# Altium PCB H03R0x.PcbDoc
Units mil, origin at the board's own origin, x right, y up, seen from the top; angles counter-clockwise.
Board outline 1363.78 x 1181.1 mil, 2 copper layers (Top Layer, Bottom Layer); 42 components, 17 nets, 98 pads, 50 vias.
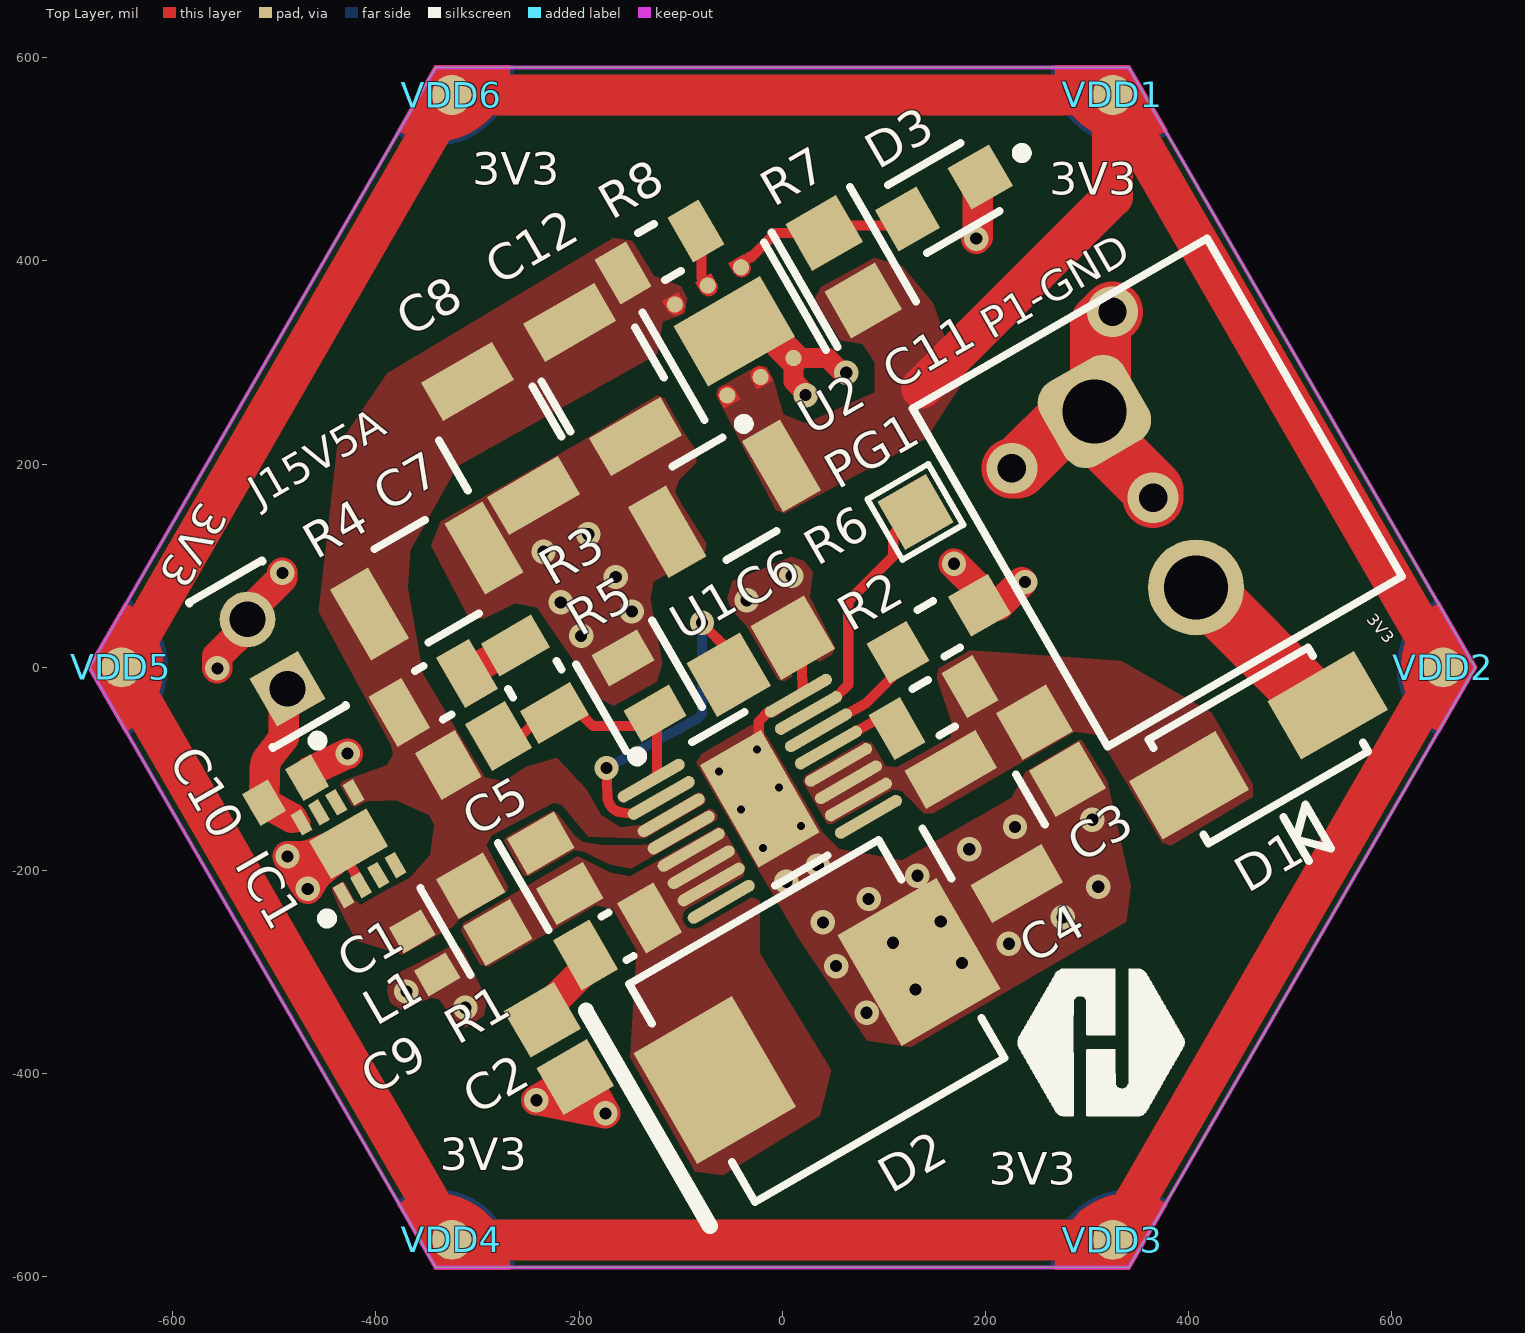
[diagram p0: Top Layer view]
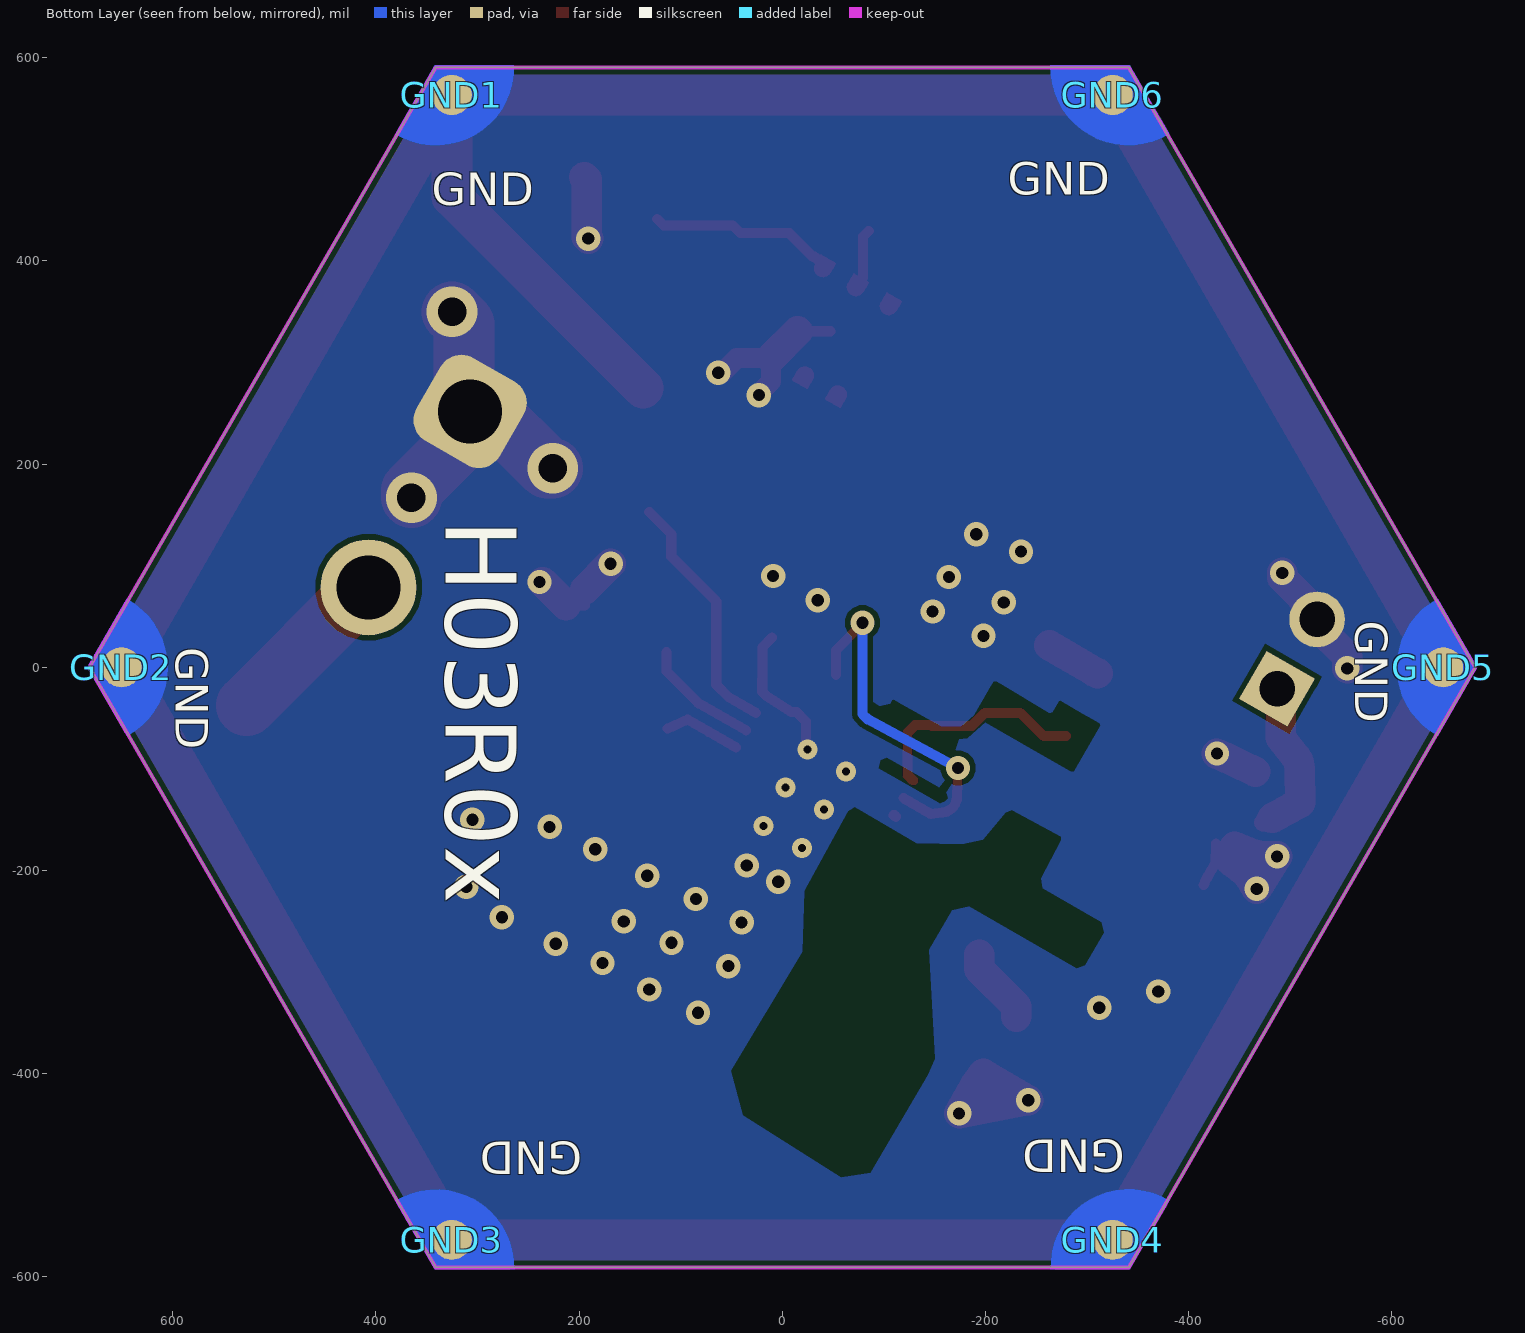
[diagram p1: Bottom Layer view, seen from below]

## Layer stack, top to bottom
Top Solder: solder mask 0.4, Solder Resist, Dk 3.5
Top Layer: signal copper 1.4
Dielectric 1: dielectric 12.6, FR-4, Dk 4.8
Bottom Layer: signal copper 1.4
Bottom Solder: solder mask 0.4, Solder Resist, Dk 3.5

## Board outline
-340.94,-590.55 340.94,-590.55 681.89,0 340.94,590.55 -340.94,590.55 -681.89,0

## Design rules (kind name [scope] priority, off if disabled: settings)
Clearance Clearance_U2_ExposePad [InComponent('U2') vs InComponent('U2')] p1: gap=5 ignorepadtopadclearanceinfootprint=TRUE
Clearance [All] p2: gap=5 ignorepadtopadclearanceinfootprint=TRUE
MinimumSolderMaskSliver [All] p1: minsoldermaskwidth=4
PolygonConnect [All] p1: connectstyle=Direct reliefconductorwidth=10 reliefentries=4 polygonreliefangle="90 Angle" airgapwidth=10
RoutingVias [All] p1: holewidth=12 width=24 viastyle="Through Hole" minholewidth=8 minwidth=18 maxholewidth=14 maxwidth=28
SilkToSilkClearance [All] p1: silktosilkclearance=6
SilkToSolderMaskClearance [IsPad] p1: minsilkscreentomaskgap=4 clearancetoexposedcopper=TRUE
SolderMaskExpansion [All] p1: expansion=0 istentingtop=FALSE
SupplyNets "Schematic Supply Nets_4" [InNet('VIN')] p1: voltage=0.000
SupplyNets "Schematic Supply Nets_3" [InNet('GND')] p2: voltage=0.000
SupplyNets "Schematic Supply Nets" [InNet('VDD')] p3: voltage=0.000
Width [All] p1: maxlimit=100 minlimit=8 preferedwidth=10 bottomlayer_minwidth=10 bottomlayer_maxwidth=10 minimp=50.000000 maximp=50.000000 favimp=50.000000
27 further rules are at their usual default settings.

## Components (designator, comment, footprint, x,y, rotation, side; value= is the part's Value field where it differs from the comment)
C1 "VJ0805Y474KXQRW1BC" CAPC2013X145X50LL20T20 -223.47,-197.81 r120 top
C2 "08055C471KAT4A" CAPC2013X94X50NL20T25 -220,-375 r300 top
C3 "08055C104KAZ2A" CAPC2013X94X50NL20T25 264.35,-82.1 r300 top
C4 "GRM32ER71H106KA12L" FP-GRM32-MFG 198.26,-156.62 r300 top value=10uF
C5 "08051A100JAT4A" CAPC2013X94X50LL20T25 -304.07,-81.83 r210 top
C6 "0805YC103MAT2A" CAPC2013X94X50ML20T25 -21.25,11 r30 top
C7 "GRM32ED71A476KE15L" FP-GRM32E-0_3-0_2-MFG -350,85 r30 top
C8 "GRM32ED71A476KE15L" FP-GRM32E-0_3-0_2-MFG -277.38,225.26 r300 top
C9 "06032U1R0BAT2A" CAPC1508X91X25LL25T13 -352,-281 r300 top
C10 "06032U1R0BAT2A" CAPC1508X91X25LL25T13 -488.86,-120.8 r30 top
C11 "GRM32ER71H106KA12L" FP-GRM32-MFG -57,166 r210 top value=10uF
C12 "GRM32ER71H106KA12L" FP-GRM32-MFG -176.8,283.33 r300 top value=10uF
D1 "B260A-13-F" DIOD-SMA-2_V 468.5,-76.77 r210 top
D2 "B560C-13-F" DIOD-B5X0C-2_M 34,-348 r30 top
D3 "APHCM2012CGCK-F01" FP-APHCM2012CGCK-F01-MFG 159,462 r210 top
GND1 "HEXABIT_UART_PORT" HEXABIT_POWER_PORT_D 325.2,563.39 r0 top
GND2 "HEXABIT_UART_PORT" HEXABIT_POWER_PORT_D 650.39,0 r300 top
GND3 "HEXABIT_UART_PORT" HEXABIT_POWER_PORT_D 325.2,-563.39 r240 top
GND4 "HEXABIT_UART_PORT" HEXABIT_POWER_PORT_D -325.2,-563.39 r180 top
GND5 "HEXABIT_UART_PORT" HEXABIT_POWER_PORT_D -650.39,0 r120 top
GND6 "HEXABIT_UART_PORT" HEXABIT_POWER_PORT_D -325.2,563.39 r60 top
IC1 "LS0505EVD22" SON50P200X200X80-9N -426.9,-173.56 r120 top
J15V5A "TMM-102-03-F-S" FP-TMM-102-03-F-S-MFG -506.68,13.1 r120 top (schematic designator J1)
L1 "MLZ2012A3R3WT000" FP-MLZ2012-0_85-IPC_C -293.3,-237.96 r120 top
P1-GND "691701500002B" 691701500002B 369.09,172.24 r300 top (schematic designator P1)
PG1 "Pad1" TESTPOINT_1P4MM_SQ 131,153 r30 top (schematic designator P2)
R1 "CRCW08052R00FNEA" RESC2013X50X30NL20T20 -162.13,-264.68 r30 top
R2 "RMCF0805ZT0R00" FP-RMCF0805-MFG 148.91,-39.64 r210 top
R3 "CRCW0805330KFKEA" FP-CRCW0805-e3-MFG -243.47,-11.6 r120 top
R4 "CRCW0805330KFKEA" FP-CRCW0805-e3-MFG -343.64,-25.11 r210 top
R5 "RC2012F3163CS" FP-RC2012-IPC_C -141,-18 r120 top
R6 "CR0805-FX-5492ELF" FP-CR0805-MFG 154,38 r30 top
R7 "RMCF0805JT1K50" FP-RMCF0805-IPC_A 60.4,394.14 r120 top
R8 "RMCF0805ZT0R00" FP-RMCF0805-MFG -120.84,408.84 r30 top
U1 "LT3976IMSE#TRPBF" LT-MSE-16-EDP_M -22.09,-129.28 r30 top
U2 "LD39200PU33R" FP-DFN6-7946637-MFG -47.36,330.79 r120 top
VDD1 "HEXABIT_UART_PORT" HEXABIT_POWER_PORT_U 325.2,563.39 r60 top
VDD2 "HEXABIT_UART_PORT" HEXABIT_POWER_PORT_U 650.39,0 r0 top
VDD3 "HEXABIT_UART_PORT" HEXABIT_POWER_PORT_U 325.2,-563.39 r300 top
VDD4 "HEXABIT_UART_PORT" HEXABIT_POWER_PORT_U -325.2,-563.39 r240 top
VDD5 "HEXABIT_UART_PORT" HEXABIT_POWER_PORT_U -650.39,0 r180 top
VDD6 "HEXABIT_UART_PORT" HEXABIT_POWER_PORT_U -325.2,563.39 r120 top

## Footprints (in the part's own frame and the unit in brackets; to place one, negate y for a bottom-side part, rotate by r counter-clockwise, add the part's x,y. Pads: shape width x height; smd on the part's side, far side on the other; paste and mask are expansions set on the pad)
691701500002B [mm] "THR - 5,08mm - PCB Vertical Open - 02p"
  rrect50% 2.4x2.4 hole 1.6: 1(-2.54,-0.35)
  round 2.4 hole 1.6: 2(2.54,-0.35)
  silkscreen extent -4.88,-4.25 4.88,4.25, body extent -4.88,-4.25 4.88,4.25, height 12.05
CAPC1508X91X25LL25T13 [mm] "Chip Capacitor, 2-Leads, Body 1.52x0.76mm, IPC High Density"
  rect 0.74x0.92 smd: 1(-0.62,0) 2(0.62,0)
  body extent -0.88,-0.51 0.89,0.51, height 0.91
CAPC2013X94X50LL20T25 [mm] "Chip Capacitor, 2-Leads, Body 2.01x1.25mm, IPC High Density"
  rect 1.15x1.35 smd: 1(-0.725,0) 2(0.725,0)
  body extent -1.1,-0.72 1.1,0.73, height 0.94
CAPC2013X94X50ML20T25 [mm] "Chip Capacitor, 2-Leads, Body 2.01x1.25mm, IPC Low Density"
  rect 1.55x1.55 smd: 1(-0.925,0) 2(0.925,0)
  body extent -1.11,-0.73 1.11,0.73, height 0.94
CAPC2013X94X50NL20T25 [mm] "Chip Capacitor, 2-Leads, Body 2.01x1.25mm, IPC Medium Density"
  rect 1.35x1.45 smd: 1(-0.825,0) 2(0.825,0)
  body extent -1.11,-0.73 1.11,0.73, height 0.94
CAPC2013X145X50LL20T20 [mm] "Chip Capacitor, 2-Leads, Body 2.00x1.25mm, IPC High Density"
  rect 1.05x1.35 smd: 1(-0.725,0) 2(0.725,0)
  body extent -1.1,-0.73 1.1,0.73, height 1.45
DIOD-B5X0C-2_M [mm] "Molded Diode, 2-Leads, Body 7.11x6.22mm, IPC Low Density"
  rect 2.85x3.2 smd: 1(-2.95,0) 2(2.95,0)
  silkscreen extent -4.87,-3.15 3.6,3.15, body extent -3.56,-3.11 3.55,3.11, height 2.63
DIOD-SMA-2_V [mm]
  rect 2.5x1.7 smd: 1(-2,0) 2(2,0)
  silkscreen extent -2.3,-1.5 2.3,3.14, body extent -2.52,-1.46 2.52,1.46, height 2.4
FP-APHCM2012CGCK-F01-MFG [mm]
  rect 1.2x1.2 smd paste+0 mask+0: 1(-1.05,0) 2(1.05,0)
  silkscreen extent -2.37,-0.98 1.05,0.97, body extent -1.75,-0.78 1.75,0.77, height 0.25
FP-CR0805-MFG [mm]
  rect 1.15x1.15 smd paste+0 mask+0: 1(-1.175,0) 2(1.175,0)
  silkscreen extent -0.23,-0.68 0.23,0.68, body extent -1.85,-0.78 1.85,0.78, height 0.25
FP-CRCW0805-e3-MFG [mm]
  rect 0.95x1.45 smd paste+0 mask+0: 1(-0.975,0) 2(0.975,0)
  silkscreen extent -0.13,-0.7 0.13,0.7, body extent -1.55,-0.82 1.55,0.82, height 0.25
FP-DFN6-7946637-MFG [mm]
  round 0.405 smd paste+0 mask+0: 1(-1.3,0.95) 2(-1.321,0) 3(-1.321,-0.95) 4(1.3,-0.95) 5(1.321,0) 6(1.321,0.95)
  rect 1.75x2.5 smd paste+0 mask+0: 7(0,0)
  Top Layer region: 1.55,0.725 1.275,0.725 1.189,0.742 1.116,0.791 1.067,0.864 1.05,0.95 1.05,0.95 1.067,1.036 1.116,1.109 1.189,1.158 1.275,1.175 1.275,1.175 1.55,1.175
  Top Layer region: -1.55,-0.725 -1.275,-0.725 -1.189,-0.742 -1.116,-0.791 -1.067,-0.864 -1.05,-0.95 -1.05,-0.95 -1.067,-1.036 -1.116,-1.109 -1.189,-1.158 -1.275,-1.175 -1.275,-1.175 -1.55,-1.175
  Top Layer region: -1.55,1.175 -1.275,1.175 -1.189,1.158 -1.116,1.109 -1.067,1.036 -1.05,0.95 -1.05,0.95 -1.067,0.864 -1.116,0.791 -1.189,0.742 -1.275,0.725 -1.275,0.725 -1.55,0.725
  Top Layer region: -1.55,0.225 -1.275,0.225 -1.189,0.208 -1.116,0.159 -1.067,0.086 -1.05,0 -1.05,0 -1.067,-0.086 -1.116,-0.159 -1.189,-0.208 -1.275,-0.225 -1.275,-0.225 -1.55,-0.225
  Top Layer region: 1.55,-1.175 1.275,-1.175 1.189,-1.158 1.116,-1.109 1.067,-1.036 1.05,-0.95 1.05,-0.95 1.067,-0.864 1.116,-0.791 1.189,-0.742 1.275,-0.725 1.275,-0.725 1.55,-0.725
  Top Layer region: 1.55,-0.225 1.275,-0.225 1.189,-0.208 1.116,-0.159 1.067,-0.086 1.05,0 1.05,0 1.067,0.086 1.116,0.159 1.189,0.208 1.275,0.225 1.275,0.225 1.55,0.225
  silkscreen extent -2.25,-1.75 1.55,1.75, body extent -1.65,-1.65 1.65,1.65, height 0.25
FP-GRM32-MFG [mm]
  rect 1.1x2.05 smd paste+0 mask+0: 1(-1.65,0) 2(1.65,0)
  silkscreen extent -0.73,-1.35 0.72,1.35, body extent -2.3,-1.45 2.3,1.45, height 0.25
FP-GRM32E-0_3-0_2-MFG [mm]
  rect 1.1x2.05 smd paste+0 mask+0: 1(-1.65,0) 2(1.65,0)
  silkscreen extent -0.72,-1.35 0.72,1.35, body extent -2.3,-1.45 2.3,1.45, height 0.25
FP-MLZ2012-0_85-IPC_C [mil]
  rect 45.45x53.39 smd paste+0 mask+0: 1(-26.61,0) 2(26.61,0)
  silkscreen extent -49,-44 49,44, body extent -53,-32 53,32, height 10
FP-RC2012-IPC_C [mil]
  rect 35.63x51.5 smd paste+0 mask+0: 1(-31.52,0) 2(31.52,0)
  silkscreen extent -49,-43 49,43, body extent -53,-31 53,31, height 10
FP-RMCF0805-IPC_A [mil]
  rect 53.33x57.56 smd paste+0 mask+0: 1(-38.42,0) 2(38.42,0)
  silkscreen extent -65,-45 65,45, body extent -85,-48 85,48, height 10
FP-RMCF0805-MFG [mm]
  rect 0.9x1.3 smd paste+0 mask+0: 1(-1.05,0) 2(1.05,0)
  silkscreen extent -0.23,-0.68 0.23,0.68, body extent -1.6,-0.78 1.6,0.77, height 0.25
FP-TMM-102-03-F-S-MFG [mm]
  rect 1.39x1.39 hole 0.89 paste-2539.97 mask+0: 1(-1,0)
  round 1.39 hole 0.89 paste-2539.97 mask+0: 2(1,0)
  silkscreen extent -2.62,-1.05 2.1,1.05, body extent -2.1,-2.07 2.1,2.07, height 0.25
HEXABIT_POWER_PORT_D [mm]
  rrect100% 1x1 smd far side paste+0: Pwr_D(0,0)
  Bottom Layer region: 1.418,-0.978 0.633,-1.25 -0.194,-1.171 -0.914,-0.754 -1.394,-0.076 -1.549,0.74 -1.549,0.74 0.429,0.74
HEXABIT_POWER_PORT_U [mm]
  rrect100% 1x1 smd paste+0: Pwr_U(0,0)
  Top Layer region: -0.081,-1.631 -0.68,-1.115 -1.01,-0.395 -1.01,0.395 -0.68,1.115 -0.081,1.631 -0.081,1.631 0.858,0
LT-MSE-16-EDP_M [mm] "SOP, 16-Leads, Body 4.1x3.1mm, Pitch 0.5mm, Thermal Pad 2.95x1.76mm, IPC Low Density"
  oval 1.89x0.3 smd: 1(-2.125,1.75) 2(-2.125,1.25) 3(-2.125,0.75) 4(-2.125,0.25) 5(-2.125,-0.25) 6(-2.125,-0.75) 7(-2.125,-1.25) 8(-2.125,-1.75) 9(2.125,-1.75) 10(2.125,-1.25) 11(2.125,-0.75) 12(2.125,-0.25) 13(2.125,0.25) 14(2.125,0.75) 15(2.125,1.25) 16(2.125,1.75)
  rect 1.76x2.95 smd: 17(0,0)
  silkscreen extent -2.25,-2.08 0.76,2.57, body extent -1.55,-2.05 1.55,2.05, height 1.1
RESC2013X50X30NL20T20 [mm] "Chip Resistor, 2-Leads, Body 2.00x1.25mm, IPC Medium Density"
  rect 1.05x1.45 smd: 1(-0.925,0) 2(0.925,0)
  silkscreen extent -0.1,-0.63 0.1,0.63, body extent -1.1,-0.72 1.1,0.73, height 0.5
SON50P200X200X80-9N [mm]
  rect 0.6x0.3 smd: 1(-1.05,0.75) 2(-1.05,0.25) 3(-1.05,-0.25) 4(-1.05,-0.75) 5(1.05,-0.75) 6(1.05,-0.25) 7(1.05,0.25) 8(1.05,0.75)
  rect 1.1x1.65 smd: 9(0,0)
  silkscreen extent -1.47,1.28 -1.23,1.52, body extent -1.05,-1 1.05,1, height 0.8
TESTPOINT_1P4MM_SQ [mil] "TESTPOINT_1P4MM_SQ"
  rect 55x55 smd: 1(0,0)
  silkscreen extent -35,-35 35,35

## Part data
C1: library part CMP-2007-01617-1, Capacitance=.47μF, Manufacturer=Vitramon, Part Number=VJ0805Y474KXQRW1BC
C2: library part CMP-2007-04419-1, Capacitance=470pF, Manufacturer="AVX Interconnect / Elco", Part Number=08055C471KAT4A
C3: library part CMP-2007-04372-1, Capacitance=100nF, Manufacturer="AVX Interconnect / Elco", Part Number=08055C104KAZ2A
C4 C11 C12: library part CMP-2000-05261-2, "CAP CER 10UF 50V X7R 1210", Capacitance=10uF, Manufacturer=Murata, Package=GRM32, Temperature="-55°C to +125°C", Temperature Characteristic=X7R, Temperature Coefficient=15%, Temperature Range High=+125°C, Temperature Range Low=-55°C, Tolerance=10%, Voltage Rating=50V, Automotive=No, Category=Cap, ComponentLink2Description=Datasheet, ComponentLink2URL=https://search.murata.co.jp/Ceramy/image/img/A01X/G101/ENG/GRM32ER71H106KA12-01.pdf, Device Class L1="Passive Components", Device Class L2=Capacitors, Device Class L3="Ceramic Capacitors", Digikey Description="CAP CER 10UF 50V X7R 1210", Height=2.7mm, Lead Free=Yes, Manufacturer Part Number=GRM32ER71H106KA12L, Material=Ceramic, Mouser Description="1210 10 uF 50 V ±10% Tolerance X7R SMT Multilayer Ceramic Capacitor", Octopart=https://octopart.com/grm32er71h106ka12l-murata-10470987, RoHS=TRUE
C5: library part CMP-2007-04117-1, Capacitance=10pF, Manufacturer="AVX Interconnect / Elco", Part Number=08051A100JAT4A
C6: library part CMP-2007-04453-1, Capacitance=10nF, Manufacturer="AVX Interconnect / Elco", Part Number=0805YC103MAT2A
C7 C8: library part CMP-06035-032018-1, "Chip Multilayer Ceramic Capacitors for General Purpose, 1210, 47uF, X7T, +22%/-33%, 10%, 10V", Capacitance=47uF, Case Code (Imperial)=1210, Case Code (Metric)=3225, Dielectric=X7T, Max Operating Temperature=125°C, Min Operating Temperature=-55°C, Package Quantity=1000, Tolerance=10%, Voltage Rating=10V, Case/Package=1210, Height=2.5mm, Length=0.126inch, Mount="Surface Mount", Packaging="Tape and Reel", Termination=SMD/SMT, Thickness=0.106inch, Voltage Rating (DC)=10V, Weight=0.00388oz, Width=0.098inch
C9 C10: library part CMP-2006-04662-1, Capacitance=1pF, Manufacturer="AVX Interconnect / Elco", Part Number=06032U1R0BAT2A
D1: library part CMP-2000-04933-1, "Schottky Barrier Rectifier, 60 V, 2 A, -65 to 150 degC, 2-Pin SMA, RoHS, Tape and Reel", If - Forward Current=2A, Ifsm - Forward Surge Current=50A, Ir - Reverse Current=500uA, Manufacturer=DiodesIncorporated, Maximum Operating Temperature=+150C, Minimum Operating Temperature=-65C, Operating Temperature Range=-65Cto+150C, Package / Case=SMA, Package Description="2-Pin Surface Mounted Assembly, Body 4.3 x 2.605 mm, Height 2.4 mm", Package Reference=SMA-2, Vf - Forward Voltage=0.7V, Vrrm - Repetitive Reverse Voltage=60V, Brand=DiodesIncorporated, Configuration=Single, Datasheet URL=http://www.diodes.com/_files/datasheets/ds13004.pdf, Datasheet Version="Rev. 22-2, 07/2015", Factory Pack Quantity=5000, Height=2.1mm, Length=4.6mm, Manufacturer URL=http://www.diodes.com/, Mounting Style=SMD/SMT, Packaging=Reel, Product=SchottkyDiodes, Product Category=SchottkyDiodes&Rectifiers, RoHS=True, Series=B260, Technology=Si, Termination Style=SMD/SMT, Type=SchottkyBarrierRectifier, Unit Weight=0.002258oz, Width=2.92mm
D2: library part CMP-2000-05098-2, "Schottky Barrier Rectifier, 5 A, 60 V, -55 to 125 degC, 2-Pin SMD, RoHS, Tape and Reel", If - Forward Current=5A, Ifsm - Forward Surge Current=100A, Ir - Reverse Current=500uA, Manufacturer=DiodesIncorporated, Maximum Operating Temperature=+125C, Minimum Operating Temperature=-55C, Operating Temperature Range=-55Cto+125C, Package / Case=SMC, Vf - Forward Voltage=0.7V, Vrrm - Repetitive Reverse Voltage=60V, Brand=DiodesIncorporated, Configuration=Single, Datasheet URL=https://datasheet.ciiva.com/27052/1538961-27052355.pdf, Datasheet Version="Rev. 7-2, 06/2007", Factory Pack Quantity=3000, Height=2.5mm, Length=7.11mm, Manufacturer URL=http://www.diodes.com/, Mounting Style=SMD/SMT, Packaging=Reel, Product=SchottkyDiodes, Product Category=SchottkyDiodes&Rectifiers, RoHS=True, Series=B560, Technology=Si, Termination Style=SMD/SMT, Type=SchottkyBarrierRectifier, Unit Weight=0.007408oz, Width=6.22mm
D3: library part CMP-44529-000062-1, "LED GREEN CLEAR CHIP SMD", Case Code (Imperial)=0805, Case Code (Metric)=2012, Color=Green, Forward Current=20mA, Forward Voltage=2.1V, Lens Color=Clear, Max Operating Temperature=85°C, Min Operating Temperature=-40°C, Package Quantity=1, Case/Package=0805, Dominant Wavelength=570nm, Height=0.4mm, Illumination Color=Green, Lead Free="Lead Free", Length=2mm, Lens Style=Clear, Luminous Intensity=40mcd, Mount="Surface Mount", Number of LEDs=1, Number of Pins=2, Packaging="Tape and Reel", RoHS Compliant=Yes, Series=APHCM, Test Current=20mA, Viewing Angle=110°, Wavelength=570nm, Width=1.25mm
GND1 GND2 GND3 GND4 GND5 GND6: library part HEXABIT_POWER_PORT_D
IC1: "Integrated Circuit", Manufacturer_Name=LITTELFUSE, Mouser Part Number=576-LS0505EVD22, Arrow Part Number=LS0505EVD22, Arrow Price/Stock=https://www.arrow.com/en/products/ls0505evd22/littelfuse?region=nac, Datasheet Link=https://www.littelfuse.com/media?resourcetype=datasheets&itemid=1bf74099-32be-4af5-b3e1-7da02015becb&filename=littelfuse-over-voltage-protection--ls0505evd22-datasheet-(1), Height=0.8mm, Manufacturer_Part_Number=LS0505EVD22, Mouser Price/Stock=https://www.mouser.co.uk/ProductDetail/Littelfuse/LS0505EVD22?qs=4ASt3YYao0X%252Bg2o9Wvd%2Ftg%3D%3D
J15V5A: library part CMP-02766-001614-1, "CONN HEADER VERT 2POS 2MM", Contact Plating=Gold, Gender=Male, Lead Free="Lead Free", Mount="Through Hole", Number of Contacts=2, Number of Rows=1, Packaging=Bulk, Pitch=2mm, Radiation Hardening=No, RoHS Compliant=Yes, Termination=Solder
L1: library part CMP-08253-000308-1, "Shielded Multilayer Inductor 3.3uH ±20% 450mA 442mΩ SMD 0805", Case Code (Imperial)=0805, Case Code (Metric)=2012, Current Rating=450mA, DC Resistance (DCR)=442mR, Inductance=3.3uH, Max Operating Temperature=125°C, Min Operating Temperature=-55°C, Package Quantity=1, Saturation Current=200mA, Self Resonant Frequency=90MHz, Test Frequency=10MHz, Tolerance=20%, Case/Package=0805, Core Material=Ferrite, Height - Seated (Max)=0.041inch, Lead Free="Lead Free", Length=0.079inch, Mount="Surface Mount", Packaging="Cut Tape", RoHS Compliant=Yes, Shielding=Shielded, Width=0.049inch
P1-GND: library part CMP-1502-02318-2, Color=Black, Current Rating=10A, Max Operating Temperature=105°C, Min Operating Temperature=-40°C, Voltage Rating=300V, Connector Type="Terminal Block", Contact Gender=Male, Contact Material=Brass, Contact Plating=Tin, Gender=Male, Housing Material=Polymer, Lead Pitch=5.08mm, Length=9.76mm, Mount="Through Hole", NexarPartId=22866741, Number of Contacts=2, Number of Pins=2, Pitch=5.08mm, REACH SVHC=Unknown, RoHS=Compliant, Termination=PCB
PG1: library part CMP-030-000029-1, "Pad  2.5mm *  2.5mm", Component Type=Standard, Design Item ID=Pad1, Library=Hexabitz, Pin Count=1, Source=Connectors.SchLib
R1: library part CMP-2001-03791-1, Manufacturer="Vishay Dale", Resistance=2Ω, Part Number=CRCW08052R00FNEA
R2 R8: library part CMP-26527-000017-1, "RES 0 OHM JUMPER 1/8W 0805", Case Code (Imperial)=0805, Case Code (Metric)=2012, Max Operating Temperature=155°C, Max Power Dissipation=125mW, Min Operating Temperature=-55°C, Resistance=0mR, Case/Package=0805, Composition="Thick Film", Contact Plating=Tin, Depth=1.25mm, Features="Automotive AEC-Q200", Height=0.026inch, Lead Free="Lead Free", Length=2mm, Military Standard=Not, Mount="Surface Mount", Number of Terminations=2, Packaging="Tape and Reel", Power Rating=125mW, Radiation Hardening=No, Width=0.049inch
R3 R4: library part CMP-2001-03821-2, "RES Thick Film, 330kΩ, 1%, 0.125W, 100ppm/°C, 0805", Case Code (Imperial)=0805, Case Code (Metric)=2012, Max Operating Temperature=155°C, Min Operating Temperature=-55°C, Package Quantity=5000, Power Rating=125mW, Resistance=330kR, Temperature Coefficient=100ppm/°C, Tolerance=1%, Voltage Rating=150V, Case/Package=0805, Composition="Thick Film", Contact Plating=Tin, Depth=1.25mm, Height=0.45mm, Lead Free="Lead Free", Length=2mm, Military Standard=Not, Packaging="Tape and Reel", Radiation Hardening=No, Termination=SMD/SMT, Voltage Rating (DC)=150V, Weight=0.000194oz, Width=1.25mm
R5: library part CMP-13261-004620-1, "Res Thick Film 0805 316kΩ 1% 0.125W ±100ppm/°C Molded SMD T/R", Case Code (Imperial)=0805, Case Code (Metric)=2012, Max Operating Temperature=155°C, Max Power Dissipation=125mW, Min Operating Temperature=-55°C, Resistance=316kR, Temperature Coefficient=100ppm/°C, Tolerance=1%, Voltage Rating (DC)=150V, Case/Package=0805, Composition="Thick Film", Contact Plating=Tin, Depth=1.25mm, Features="Moisture Resistant", Height=0.024inch, Lead Free="Lead Free", Length=2mm, Military Standard=Not, Number of Terminations=2, Packaging="Tape and Reel", Power Rating=125mW, Radiation Hardening=No, Width=0.049inch
R6: library part CMP-07231-002869-1, "Thick Film Chip Resistors 0805 54.9kΩ 0.125W 1% 100ppm/°C", Case Code (Imperial)=0805, Case Code (Metric)=2012, Max Operating Temperature=155°C, Min Operating Temperature=-55°C, Package Quantity=5000, Power Rating=125mW, Resistance=54.9kR, Temperature Coefficient=100ppm/°C, Tolerance=1%, Voltage Rating=150V, Case/Package=0805, Composition="Thick Film", Contact Plating=Tin, Depth=1.25mm, Height=0.5mm, Length=2mm, Military Standard=Not, Mount="Surface Mount", Packaging="Tape and Reel", Radiation Hardening=No, Termination=SMD/SMT, Thickness=508um, Width=1.25mm
R7: library part CMP-26527-000060-1, "1.5kΩ ±5% 0.125W 0805 Thick Film Chip Resistor AEC-Q200 compliant", Case Code (Imperial)=0805, Case Code (Metric)=2012, Max Operating Temperature=155°C, Max Power Dissipation=125mW, Min Operating Temperature=-55°C, Resistance=1.5kR, Resistor Type="Thick Film", Temperature Coefficient=100ppm/°C, Tolerance=5%, Case/Package=0805, Construction=Rectangular, Contact Plating=Tin, Depth=1.25mm, Features="Automotive AEC-Q200", Height=0.026inch, Lead Free="Lead Free", Length=0.079inch, Military Standard=Not, Mount="Surface Mount", Number of Terminations=2, Packaging="Tape and Reel", Power Rating=125mW, Radiation Hardening=No, RoHS Compliant=Yes, Series=RMCF, Size Code=0805, Width=0.049inch
U1: library part CMP-019-00049-1, "LT3976 - 40V, 5A, 2MHz Step-Down Switching Regulator with 3.3μA Quiescent Current", Max Operating Temperature=125°C, Min Operating Temperature=-40°C, Output Current=5A, Output Voltage=38.8V, Pins=16
U2: library part CMP-12153-000011-1, "IC REG LINEAR 3.3V 2A 6DFN", Case/Package=DFN, Dropout Voltage=130mV, Max Input Voltage=6V, Max Operating Temperature=125°C, Min Input Voltage=1.25V, Min Operating Temperature=-40°C, Operating Supply Current=1mA, Output Current=2A, Output Voltage=3.3V, Package Quantity=3000, Lead Free="Lead Free", Mount="Surface Mount", Number of Outputs=1, Number of Regulators=1, Output Type=Fixed, Packaging="Tape and Reel"
VDD1 VDD2 VDD3 VDD4 VDD5 VDD6: library part HEXABIT_POWER_PORT_U

## Via types
v1: diameter 24, hole 12, Top Layer to Bottom Layer, 38 vias
v2: diameter 19.68, hole 7.87, Top Layer to Bottom Layer, 6 vias
v3: diameter 24, hole 12, Top Layer to Bottom Layer, tented top, 3 vias
v4: diameter 50, hole 28, Top Layer to Bottom Layer, 3 vias

## Nets (pads, with @x,y where several pads share a name; then routed paths per layer and width w, separated by ;. In a path a pad name is that pad's centre, name@x,y a point inside that pad or via, vN(x,y) a via of type N, cw(c..) or ccw(c..) an arc to the next point about the centre after c; other vN are vias at no path point)
GND: C2.2 C3.2 C4.2 C6.2 C7.2 C8.2 C9.2 C10.2 C11.2 C12.2 D2.2 D3.1 GND1.Pwr_D GND2.Pwr_D GND3.Pwr_D GND4.Pwr_D GND5.Pwr_D GND6.Pwr_D IC1.2 IC1.9 J15V5A.2 P1-GND.1 R5.2 R6.2 U1.16 U1.17 U2.3 U2.7 | length 1292.8
  Top Layer w10: v1@-430.54,-87.47 v1(-427.86,-84.8) ; IC1.9 -426.32,-192.46 -417.38,-207.93 IC1.2 ; U2.7 U2.7@-15.31,330.79 ; v2(-25,-80.95) -23.2,-79.15 -23.2,-53.2 -13.78,-43.78 -8.49,-43.78 U1.16 19.76,-23.94 19.76,-11.3 19.38,-10.92 19.38,20.11 C6.2 ; v1(23,268) v1@23,269.5 ; v1@59.21,290 v1(63,290) ; v1@169,101.88 v1(169,102) ; R6.2@194.06,76.82 R6.2 R6.2@212.88,61.13 ; v1@235.75,84 v1(239,84)
  Top Layer w20: v1@23,269.5 11.04,281.46 U2.3 44.78,304.43 v1@59.21,290
  Top Layer w30: v1(-556,-1) -556,10.87 -526.37,40.5 J15V5A.2 -526.37,53.88 -492,88.25 v1(-492,93) ; C10.2@-465.72,-102.59 v1(-427.86,-84.8) ; IC1.9@-445.37,-176.54 -465.08,-184.34 cw(c-472.35,-165.71) -471.96,-185.71 v1(-487,-186) -482.91,-192.55 -470.22,-212.85 v1(-467,-218) -459.87,-206.39 cw(c-442.82,-216.85) -455.25,-201.18 -442.55,-191.11 IC1.9@-438.71,-188.07 ; U2.7@-15.31,330.79 U2.3 ; v1@169,101.88 R6.2@194.06,76.82 ; v1(191,422) 192.37,423.37 192.37,480.24 D3.1 ; R6.2@212.88,61.13 v1@235.75,84 ; v1(-242,-426) v1(-174,-439) -191.02,-409.52 -197.66,-399.99 -209.21,-407.07 v1(-242,-426)
  Top Layer w60: v4(226,196) 231.32,196 287.28,251.96 P1-GND.1 ; v4(325,350) 313.17,338.17 313.17,257.96 P1-GND.1 ; v4(365,167) 365,174.23 307.16,232.07 P1-GND.1
  other v1: -312,-335 -370,-319 131,-317 177,-291 223,-272 109,-271 40,-251 156,-250 276,-246 311,-216 4,-211 133,-205 35,-195 184,-179 229,-157 305,-150 -198,31 -148,55 -218,64 -35,66 -164,89 9,90 -235,114 -191,131
  other v2: -19.19,-177.61 18.31,-155.96 -40.85,-140.11 -3.34,-118.45 -62.5,-102.6
  other v3: 83,-340 53,-294 85,-228
LD_EN: R8.2 U2.5 | length 58.5
  Top Layer w10: R8.2 -79.41,423.88 -79.41,383.49 -73.37,377.45 U2.5
LD_PG: D3.2 R7.2 U2.4 | length 183.9
  Top Layer w10: U2.4 -40.56,395.42 -31.86,404.12 ; -31.06,403.31 -6.96,427.41 R7.2 48.68,434.9 116.77,434.9 D3.2
LT_BST: C1.2 U1.4
LT_EN: R2.2 U1.13 | length 77
  Top Layer w10: U1.13 72.54,-63.28 93.24,-51.33 R2.2
LT_FB: C5.1 R3.1 R5.1 U1.1 | length 223.8
  Top Layer w10: C5.1 -257.15,-67.55 -234.44,-44.85 -199.2,-44.85 -186.42,-57.62 -147.35,-57.62 -146.45,-56.72 -130.89,-56.72 -123.23,-64.38 -123.23,-105.68 U1.1
LT_JUMP: C10.1 IC1.8 J15V5A.1 | length 161.2
  Top Layer w17.56: IC1.8@-479.18,-149.93 IC1.8
  Top Layer w25.42: -482.97,-147.95 IC1.8@-479.18,-149.93
  Top Layer w30: J15V5A.1 -490.8,-24.8 -490.8,-69.38 -505.19,-87.93 ccw(c-489.39,-100.19) -509.39,-99.82 C10.1 -482.97,-147.95
LT_PG: PG1.1 U1.15 | length 245.8
  Top Layer w10: U1.15 52.86,-29.18 65,-17.04 65,65 109.25,109.25 109.25,131.25 PG1.1
LT_RT: R6.1 U1.14 | length 117.1
  Top Layer w10: U1.14 62.7,-46.23 81.11,-36.16 ccw(c76.31,-27.38) 83.38,-34.46 113.94,-3.9 R6.1
LT_SS: C6.1 U1.2 | length 354.6
  Top Layer w10: v1(-173,-99) -172,-127.65 ccw(c-156.1,-127.09) -157.79,-142.91 -146.26,-144.14 U1.2 ; v1(-79,44) -79,43.22 -52.79,17.01 C6.1
  Bottom Layer w10: v1(-173,-99) -84,-51 -79,-46 v1(-79,44)
LT_SW: C1.1 D2.1 L1.1 R1.2 U1.5 U1.6 U1.7
LT_VIN: C3.1 C4.1 D1.2 R2.1 U1.10 U1.11 U1.12
LT_VOUT: C5.2 C7.1 C8.1 C9.1 C12.1 IC1.1 IC1.5 L1.2 R4.2 R8.1 U1.3 U2.6 | length 3.3
  Top Layer w10: U1.3@-112,-147 -110.54,-145.54 U1.3
NetC2_1: C2.1 R1.1 | length 75.9
  Top Layer w30: C2.1@-230.14,-343.73 -230.14,-333.35 -193.67,-296.87 R1.1
NetR3_2: R3.2 R4.1 | length 55.1
  Top Layer w30: R4.1 -307.19,-4.07 -274.39,14.87 R3.2
VDD: C11.1 R7.1 U2.1 U2.2 VDD1.Pwr_U VDD2.Pwr_U VDD3.Pwr_U VDD4.Pwr_U VDD5.Pwr_U VDD6.Pwr_U | length 4269.2
  Top Layer w40: 137,275 325.2,463.2
  Top Layer w40.38: 325.2,463.2 VDD1.Pwr_U ; VDD1.Pwr_U VDD6.Pwr_U VDD5.Pwr_U VDD4.Pwr_U VDD3.Pwr_U VDD2.Pwr_U VDD1.Pwr_U
VIN: D1.1 P1-GND.2 | length 177.6
  Top Layer w40: P1-GND.2 P1-GND.2@410.97,78.75 ; D1.1@527.12,-37.4 D1.1
  Top Layer w60: P1-GND.2@410.97,78.75 D1.1@527.12,-37.4
pads on no net: IC1.3 IC1.4 IC1.6 IC1.7 U1.8 U1.9

## Polygon pours and split planes (outlines as drawn)
LT_VOUT on Top Layer "LT_VOUT_L01_P011" (solid, pour order 11): -159.56,-157.16 -137.94,-154.9 -82.65,-123.08 -78.18,-124.27 -75.45,-130.58 -76.87,-134.21 -135.64,-168.44 -190.87,-166.83 -216.72,-135.59 -225,-133 -286,-165 -291.44,-175.17 -270,-216 -270.68,-221.48 -319,-249 -324.54,-255.45 -374.07,-282.75 -419.16,-268.91 -435,-239 -443,-220 -443,-216 -433,-211 -430.27,-212.36 -421.55,-228.73 -414.96,-232.02 -367.27,-207.67 -346.43,-184.75 -342.49,-155.19 -347.58,-145.78 -380.19,-130.58 -409,-132 -420,-137 -423.55,-135.59 -435,-116 -433,-112 -389.5,-96.5 -382.89,-86 -385.09,-76.42 -445.78,35.77 -456.33,55.29 -438.13,216.62 -388.89,289.57 -166,423 -147.55,419.74 -126.29,385.33 -99.61,374.89 -93.54,363.3 -96.65,347.73 -117.8,340.26 -122.82,308.34 -320,198 -366.06,115.49 -368.86,78.32 -353.74,-6.11 -293,-108 -274,-112 -252,-98 -222,-89 -193,-120 -178.8,-144.85
VDD on Top Layer "VDD_L01_P012" (solid, remove dead copper, pour order 12): -9,283 -15.46,295.92 -22.82,297.66 -63,275 -65,268 -5.72,154.65 1.78,151.83 141.72,225.68 175.75,277.74 148.81,358.58 117.91,394.93 91,403 38.38,374.4 32,363 57,322 79,318 91,300.4 91,270.66 23.26,240.29 1,249
GND on Top Layer "GND_L01_P010" (solid, remove dead copper, pour order 10): -375,-337 -344.78,-325 -337,-327 -324,-348 -311.62,-354.75 -294,-343 -291,-327 -316,-275 -321.02,-271.75 -386,-305 -389,-318 -386,-330
GND on Top Layer "GND_L01_P009" (solid, remove dead copper, pour order 9): -49,85 9,109 21,105 30,94 27.21,69.7 52.3,19.21 52.55,18.8 49.96,13.12 1.56,-13.59 -4,-12 -35.32,41.25 -49.96,56.12 -54.16,68.24
GND on Top Layer "GND_L01_P008" (solid, remove dead copper, pour order 8): -345.5,119.5 -336,144 -200,221 -123,268 -116,265 -98,233 -84,212 -84.5,201.5 -102,184 -106,173 -99,160 -75,122 -75.81,113.37 -127.06,84.31 -130,67 -118.12,3.87 -123.61,-13.98 -166,-38 -179.88,-30.71 -241.4,58.76 -263,63 -294,48 -309,50
LT_VIN on Top Layer "LT_VIN_L01_P006" (solid, pour order 6): 463,-115 463,-127.2 382.41,-175.41 373.99,-172.5 311,-67 287.85,-63.34 148.51,-143.39 139.39,-143.39 124,-128 109.07,-120.13 49.29,-154 44.11,-154 20,-112 23.11,-106.11 80.9,-71.83 87.17,-72.49 101.81,-97.37 112.67,-98.2 166,-69 168,-57 152,-10.14 154,-1 185.21,16.88 333,6.77 422,-44
LT_BST on Top Layer "LT_BST_L01_P005" (solid, pour order 5): -273.87,-170.73 -272.09,-167.19 -226.13,-141.12 -222,-143 -204.98,-165 -197,-171.52 -177,-175 -143,-175 -131.85,-173.88 -71.92,-139.27 -68.01,-140.25 -64.18,-145.02 -64.18,-150.17 -149.01,-198.24 -170.35,-193.82 -194,-182 -204.91,-180 -248.8,-205 -254.29,-205
LT_SW on Top Layer "LT_SW_L01_P004" (solid, remove dead copper, pour order 4): -63,-157 -58.65,-158.1 -22,-221.72 -22,-281.6 48.21,-396.28 36.86,-441.2 -58.44,-500 -85.89,-496.65 -149.46,-383.63 -143.14,-278.37 -166.67,-237.67 -183.84,-234.13 -224.5,-257.5 -291.12,-295.79 -297,-294 -316,-259 -314,-252 -201.54,-185.73 -169,-202 -149.51,-205.79
GND on Top Layer "GND_L01_P003" (solid, remove dead copper, pour order 3): -84.81,-94.01 -79.27,-84.79 -30.87,-57 -21.92,-57 39.64,-162.52 55.56,-178.44 118,-190 225.97,-128.52 239.55,-102.59 291.67,-71.87 294.55,-71.87 320,-112 343.14,-215.25 338.59,-250.16 126.26,-373.74 83.53,-367.55 15.68,-266.34
GND on Bottom Layer "GND_L02_P007" (solid, remove dead copper, pour order 7): -785,657 730,657 743,670 743,-708 -738,-708 -757,-689

## Keep-outs
Keep-Out Layer:
  the board outline again, w3.94

## Other copper
Bottom Layer:
  pour cut-out: -525.71,-9.47 -477.36,19.96 -473.25,17.34 -446.52,-29.75 -446.26,-33.36 -492.33,-61 -498.5,-61 -527.63,-16.19
  pour cut-out: -272.43,-33.29 -266,-44 -263,-45 -211,-14 -207.97,-14.02 -189,-47 -176.24,-58.38 -156,-58 -109.55,-31.76 -108.4,-32.26 -101,-46 -102,-49 -146,-73 -182,-69.89 -200,-54 -252,-84 -283.94,-102.1 -287,-102.1 -313,-57 -312,-55 -295.3,-45.7 -273.54,-32.73
  pour cut-out: -160.76,-122.27 -163,-129 -160,-132 -155.56,-133.78 -155.2,-133.6 -95,-99.43 -96.79,-91.48 -103,-89
  pour cut-out: -184,-235 -167,-239 -144.3,-277.7 -150.06,-385.03 -143.07,-400.84 -143.04,-400.89 -86.72,-497.61 -58,-502 38.64,-441.04 50,-397 -20,-280.02 -22,-220 -65,-141.7 -71.09,-137.46 -132,-173 -177,-174 -197.68,-169.86 -220,-143 -225.91,-140.58 -274,-166.82 -274,-170.33 -254.36,-207.43 -256.1,-217.38 -313.91,-250.84 -316.44,-260.95 -297.75,-293 -289.77,-295.9

## Silkscreen, mask and mechanical layers (free items; w line width, h text height)
Top Overlay:
  drawing of 1337 lines, arcs and shapes, not listed
  text "3V3" at -305,475.01 h32
  text "3V3" at 263,465.01 h32
  text "3V3" at -571.8,164.9 h32 r240
  text "3V3" at 574.44,47.06 h12 r310
  text "3V3" at -337,-494.99 h32
  text "3V3" at 203,-508.99 h32
Bottom Overlay:
  text "GND" at -221.7,465.18 h32
  text "GND" at 345,455.01 h32
  text "H03R0x" at 331,146 h70 r90
  text "GND" at -564.01,46 h32 r90
  text "GND" at 596.99,20 h32 r90
  text "GND" at -337,-465.01 h32 r180
  text "GND" at 197,-467.01 h32 r180
Top Solder:
  drawing of 20 lines, arcs and shapes, not listed
Dimensions:
  the board outline again, w3.94